# EAGLE board signal_processing_module (EAGLE 9.5.2)
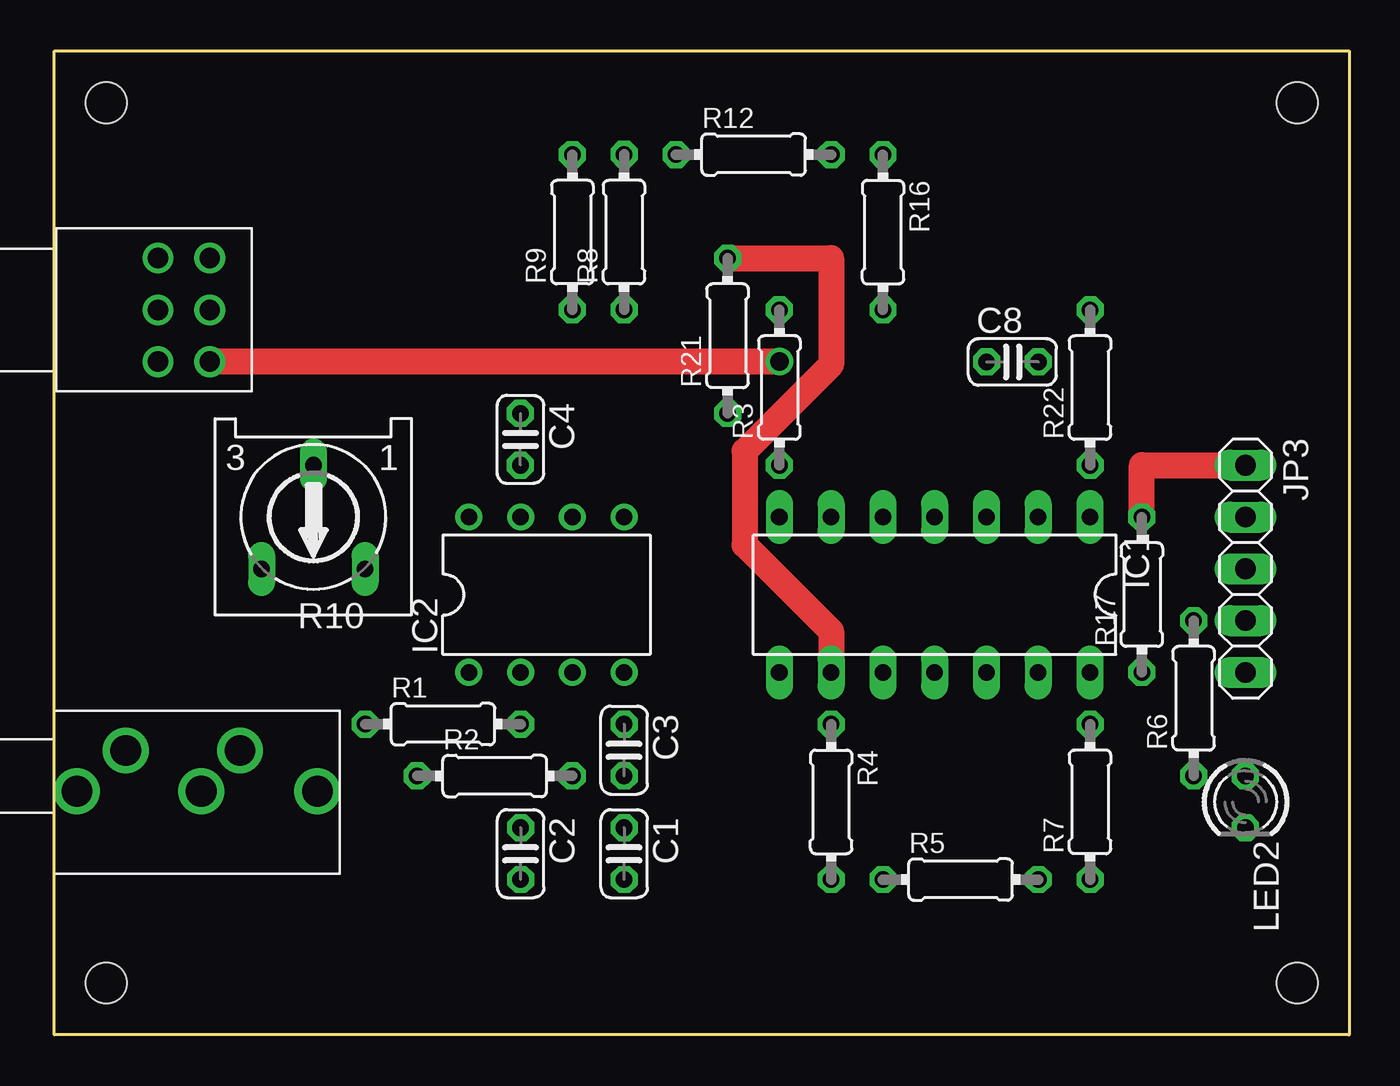
[diagram p0: board, top side]
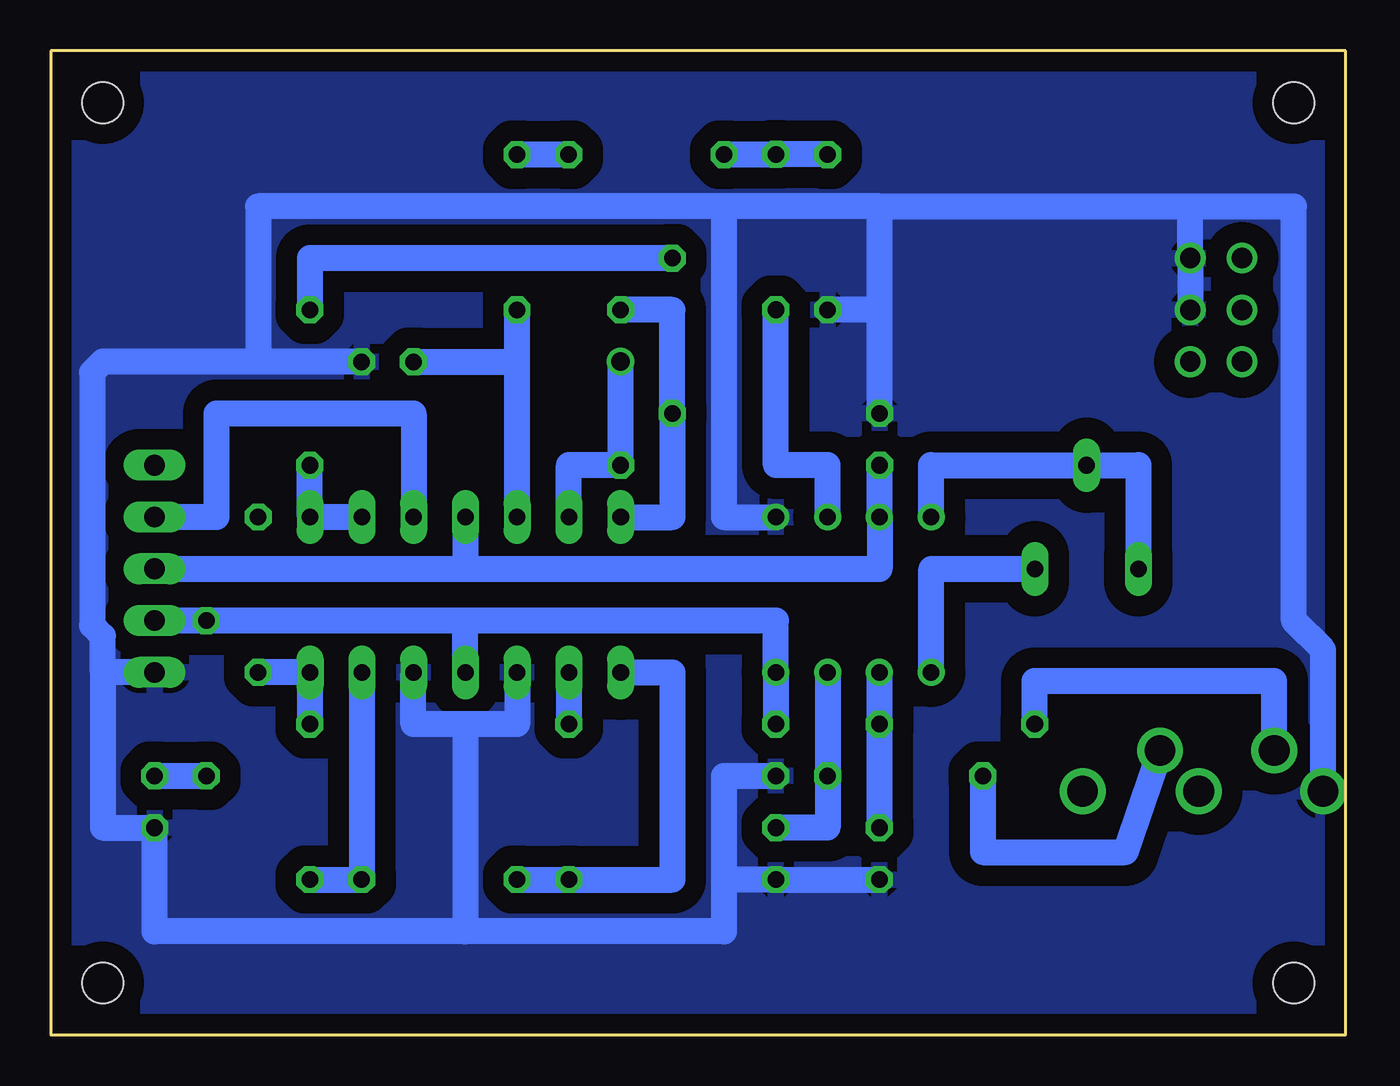
[diagram p1: board, bottom side, seen from below]

Size 63.5 x 48.26 mm. Coordinates in mm from the lower left corner, seen from the top.
Outline: 0,0 63.5,0 63.5,48.26 0,48.26 0,0
Copper layers (1*16): Top 0.035mm / dielectric 1.5mm / Bottom 0.035mm
Design rules "default *": minimum track width 6mil, minimum drill 0.35mm, track to track 0.4mm, track to pad 0.4mm, pad to pad 0.4mm, via to via 0.4mm, smd to smd 0.4mm, copper to edge 40mil, drill to drill 6mil, minimum pad ring 10mil, minimum via ring 8mil, stop-mask expansion 4mil, vias tented up to drill 0mil, thermal gap 10mil
Net classes: 0 default: width 1.27 mm, clearance 0.381 mm
Holes 2 mm at 2.54,45.72 2.54,2.54 60.96,2.54 60.96,45.72
Milling: area 0,0 to 63.5,48.3

## Footprints (pad centres in the part's own frame; a part is rotated, then mirrored left to right if it is on the bottom)
C025-024X044 = drill 0.813 octagon: 1 -1.27,0; 2 1.27,0
DIL14 = drill 0.813 long: 1 -7.62,-3.81; 2 -5.08,-3.81; 3 -2.54,-3.81; 4 0,-3.81; 5 2.54,-3.81; 6 5.08,-3.81; 7 7.62,-3.81; 8 7.62,3.81; 9 5.08,3.81; 10 2.54,3.81; 11 0,3.81; 12 -2.54,3.81; 13 -5.08,3.81; 14 -7.62,3.81
DIL08 = drill 0.813 pad 1.27: 1 -3.81,-3.81; 2 -1.27,-3.81; 3 1.27,-3.81; 4 3.81,-3.81; 5 3.81,3.81; 6 1.27,3.81; 7 -1.27,3.81; 8 -3.81,3.81
1X05 = drill 1.016 long: 1 -5.08,0; 2 -2.54,0; 3 0,0; 4 2.54,0; 5 5.08,0
LED3MM = drill 0.813 octagon: A -1.27,0; K 1.27,0
0204/7 = drill 0.813 octagon: 1 -3.81,0; 2 3.81,0
RS3 = drill 0.813 long: A -2.54,2.54; E 2.54,2.54; S 0,-2.54
MJ-354W-SG = drill 1.5: P$1 -1.1,0.75; P$2 -3.5,-1.25; P$3 -7.2,0.75; P$4 -9.1,-1.25; P$5 -12.9,0.75
2CH_VR = drill 1: P$1 0,0; P$2 0,2.54; P$3 0,-2.54; P$4 -2.54,-2.54; P$5 -2.54,0; P$6 -2.54,2.54

## Placement (x,y rotation side)
C1  47p  [C025-024X044]  27.95,8.89 270 top
C2  47p  [C025-024X044]  22.87,8.89 270 top
C3  0.1u  [C025-024X044]  27.95,13.97 270 top
C4  0.1u  [C025-024X044]  22.85,29.21 270 top
C8  0.1u  [C025-024X044]  46.99,33.01 0 top
IC1  LM324N  [DIL14]  43.17,21.59 180 top
IC2  TL061P  [DIL08]  24.14,21.59 0 top
JP3  [1X05]  58.42,22.86 270 top
LED2  [LED3MM]  58.42,11.43 270 top
R1  1k  [0204/7]  19.06,15.24 0 top
R2  1k  [0204/7]  21.6,12.7 0 top
R3  100k  [0204/7]  35.56,31.75 90 top
R4  10k  [0204/7]  38.1,11.43 270 top
R5  10k  [0204/7]  44.45,7.62 0 top
R6  4.7k  [0204/7]  55.88,16.51 90 top
R7  10k  [0204/7]  50.8,11.43 90 top
R8  10k  [0204/7]  27.94,39.38 90 top
R9  10k  [0204/7]  25.41,39.37 90 top
R10  [RS3]  12.7,25.4 180 top
R12  100k  [0204/7]  34.3,43.18 0 top
R16  68k  [0204/7]  40.64,39.37 270 top
R17  1k  [0204/7]  53.34,21.59 90 top
R21  10k  [0204/7]  33.02,34.29 90 top
R22  10k  [0204/7]  50.8,31.75 90 top
U$2  MJ-354W-SG  [MJ-354W-SG]  0,12.7 180 top
U$3  VR_2CH  [2CH_VR]  5.08,35.56 180 top

## Library data of the parts
C1-C4 C8 = rcl; SPICEPREFIX: C
IC1 IC2 = linear
JP3 = pinhead
LED2 = led
R1-R9 R12 R16 R17 R21 R22 = rcl; SPICEPREFIX: R
R10 = pot
U$2 U$3 = myparts

## Nets
+5V: C4.2 IC1.4 IC2.7 JP3.3
-5V: C3.1 IC1.11 IC2.4 JP3.4 R6.2
GND: C1.2 C2.2 C3.2 C4.1 C8.2 IC1.10 IC1.12 IC2.5 JP3.5 LED2.K R9.1 U$2.P$1 U$3.P$4 U$3.P$5
N$1: R1.1 U$2.P$2
N$2: R2.1 U$2.P$4
N$3: C1.1 IC2.3 R2.2
N$4: C2.1 IC2.2 R1.2
N$5: IC2.8 R10.E R10.S
N$6: IC2.6 R8.1
N$7: IC2.1 R10.A
N$8: R12.2 R16.1
N$9: IC1.13 R5.2 R7.1
N$10: JP3.1 R17.2
N$11: LED2.A R6.1
N$12: IC1.6 R3.1 U$3.P$6
N$13: IC1.8 R4.2 R5.1
N$14: IC1.14 R7.2 R17.1
N$15: C8.1 IC1.5 R16.2
N$16: R8.2 R9.2 R12.1
N$18: IC1.1 IC1.2 R22.1
N$21: IC1.9 R4.1 R21.2 R22.2
RAW_SIGNAL: IC1.7 R3.2 R21.1
VCC: IC1.3 JP3.2

## Tracks (layer width: path | path; a pad name or v marks a point on that pad's centre or on a via)
+5V
  Bottom 1.27: JP3.3 43.18,22.86 | 43.18,22.86 22.86,22.86 IC2.7 22.85,25.41 C4.2 | IC1.4 43.18,22.86
-5V
  Bottom 1.27: 43.18,20.32 27.94,20.32 27.94,20.31 27.95,20.31 IC2.4 C3.1 | 43.18,20.32 R6.2 JP3.4 | IC1.11 43.18,20.32
GND
  Bottom 1.27: JP3.5 60.96,17.78 | 60.96,17.78 60.96,19.56 61.49,20.08 61.49,32.49 60.96,33.02 53.34,33.02 | C4.1 22.86,35.56 | 22.86,35.56 22.86,40.64 | 60.96,17.78 60.96,10.16 LED2.K 58.42,5.08 43.18,5.08 | C2.2 C1.2 30.48,7.62 | 30.48,7.62 30.48,12.7 C3.2 | U$2.P$1 1.1,18.88 2.54,20.32 2.54,40.64 7.62,40.64 | 22.86,40.64 7.62,40.64 | 7.62,40.64 U$3.P$4 U$3.P$5 | 30.48,7.62 30.48,5.08 43.18,5.08 | 43.18,15.24 45.72,15.24 IC1.12 | 22.86,35.56 R9.1 | 22.86,40.64 30.48,40.64 | IC2.5 30.48,25.4 30.48,40.64 | 43.18,15.24 43.18,5.08 | C8.2 53.34,33.02 | 30.48,40.64 53.34,40.64 53.34,33.02 | IC1.10 40.64,15.24 43.18,15.24
  pour Bottom (isolate 1.016): 0,48.26 0,0 63.5,0 63.5,48.26
N$1
  Bottom 1.27: U$2.P$2 3.5,17.35 15.25,17.35 R1.1
N$2
  Bottom 1.27: R2.1 17.79,8.96 10.8,8.96 U$2.P$4
N$3
  Bottom 1.27: IC2.3 R2.2 25.41,10.17 25.4,10.16 C1.1
N$4
  Bottom 1.27: IC2.2 R1.2 C2.1
N$5
  Bottom 1.27: IC2.8 20.33,27.94 R10.S 10.16,27.94 R10.E
N$6
  Bottom 1.27: IC2.6 25.4,27.94 27.94,27.94 R8.1
N$7
  Bottom 1.27: IC2.1 20.32,22.86 R10.A
N$8
  Bottom 1.27: R12.2 R16.1
N$9
  Bottom 1.27: R7.1 R5.2 IC1.13
N$10
  Top 1.27: R17.2 53.34,27.94 JP3.1
N$11
  Bottom 1.27: LED2.A R6.1
N$12  (via drill 0.9)
  Top 1.27: v35.56,33.02 U$3.P$6
  Bottom 1.27: IC1.6 38.09,27.94 R3.1 v35.56,33.02
N$13
  Bottom 1.27: R5.1 R4.2 33.02,7.62 33.02,17.78 IC1.8
N$14
  Bottom 1.27: R7.2 IC1.14 R17.1
N$15
  Bottom 1.27: C8.1 40.65,33.01 | 40.65,33.01 40.64,33.02 R16.2 | IC1.5 40.63,33 40.65,33.01
N$16
  Bottom 1.27: R9.2 R8.2 R12.1
N$18
  Bottom 1.27: IC1.2 IC1.1 R22.1
N$21
  Top 1.27: IC1.9 38.09,19.8 33.86,24.04 33.86,28.64 38.1,32.88 38.1,38.1 R21.2
  Bottom 1.27: IC1.9 R4.1 | R22.2 50.8,38.1 R21.2
RAW_SIGNAL
  Bottom 1.27: IC1.7 33.02,25.4 R21.1 33.02,35.56 R3.2
VCC
  Bottom 1.27: JP3.2 55.37,25.4 55.37,30.48 45.72,30.48 45.71,30.47 IC1.3